# Altium PCB DigitalLabBoard-CS.PcbDoc (part 1 of 3)
Units mm, origin at the board's own origin, x right, y up, seen from the top; angles counter-clockwise.
Board outline 155 x 110 mm, 2 copper layers (Top Layer, Bottom Layer), stack 1.571 mm thick; 189 components, 184 nets, 775 pads, 859 vias.
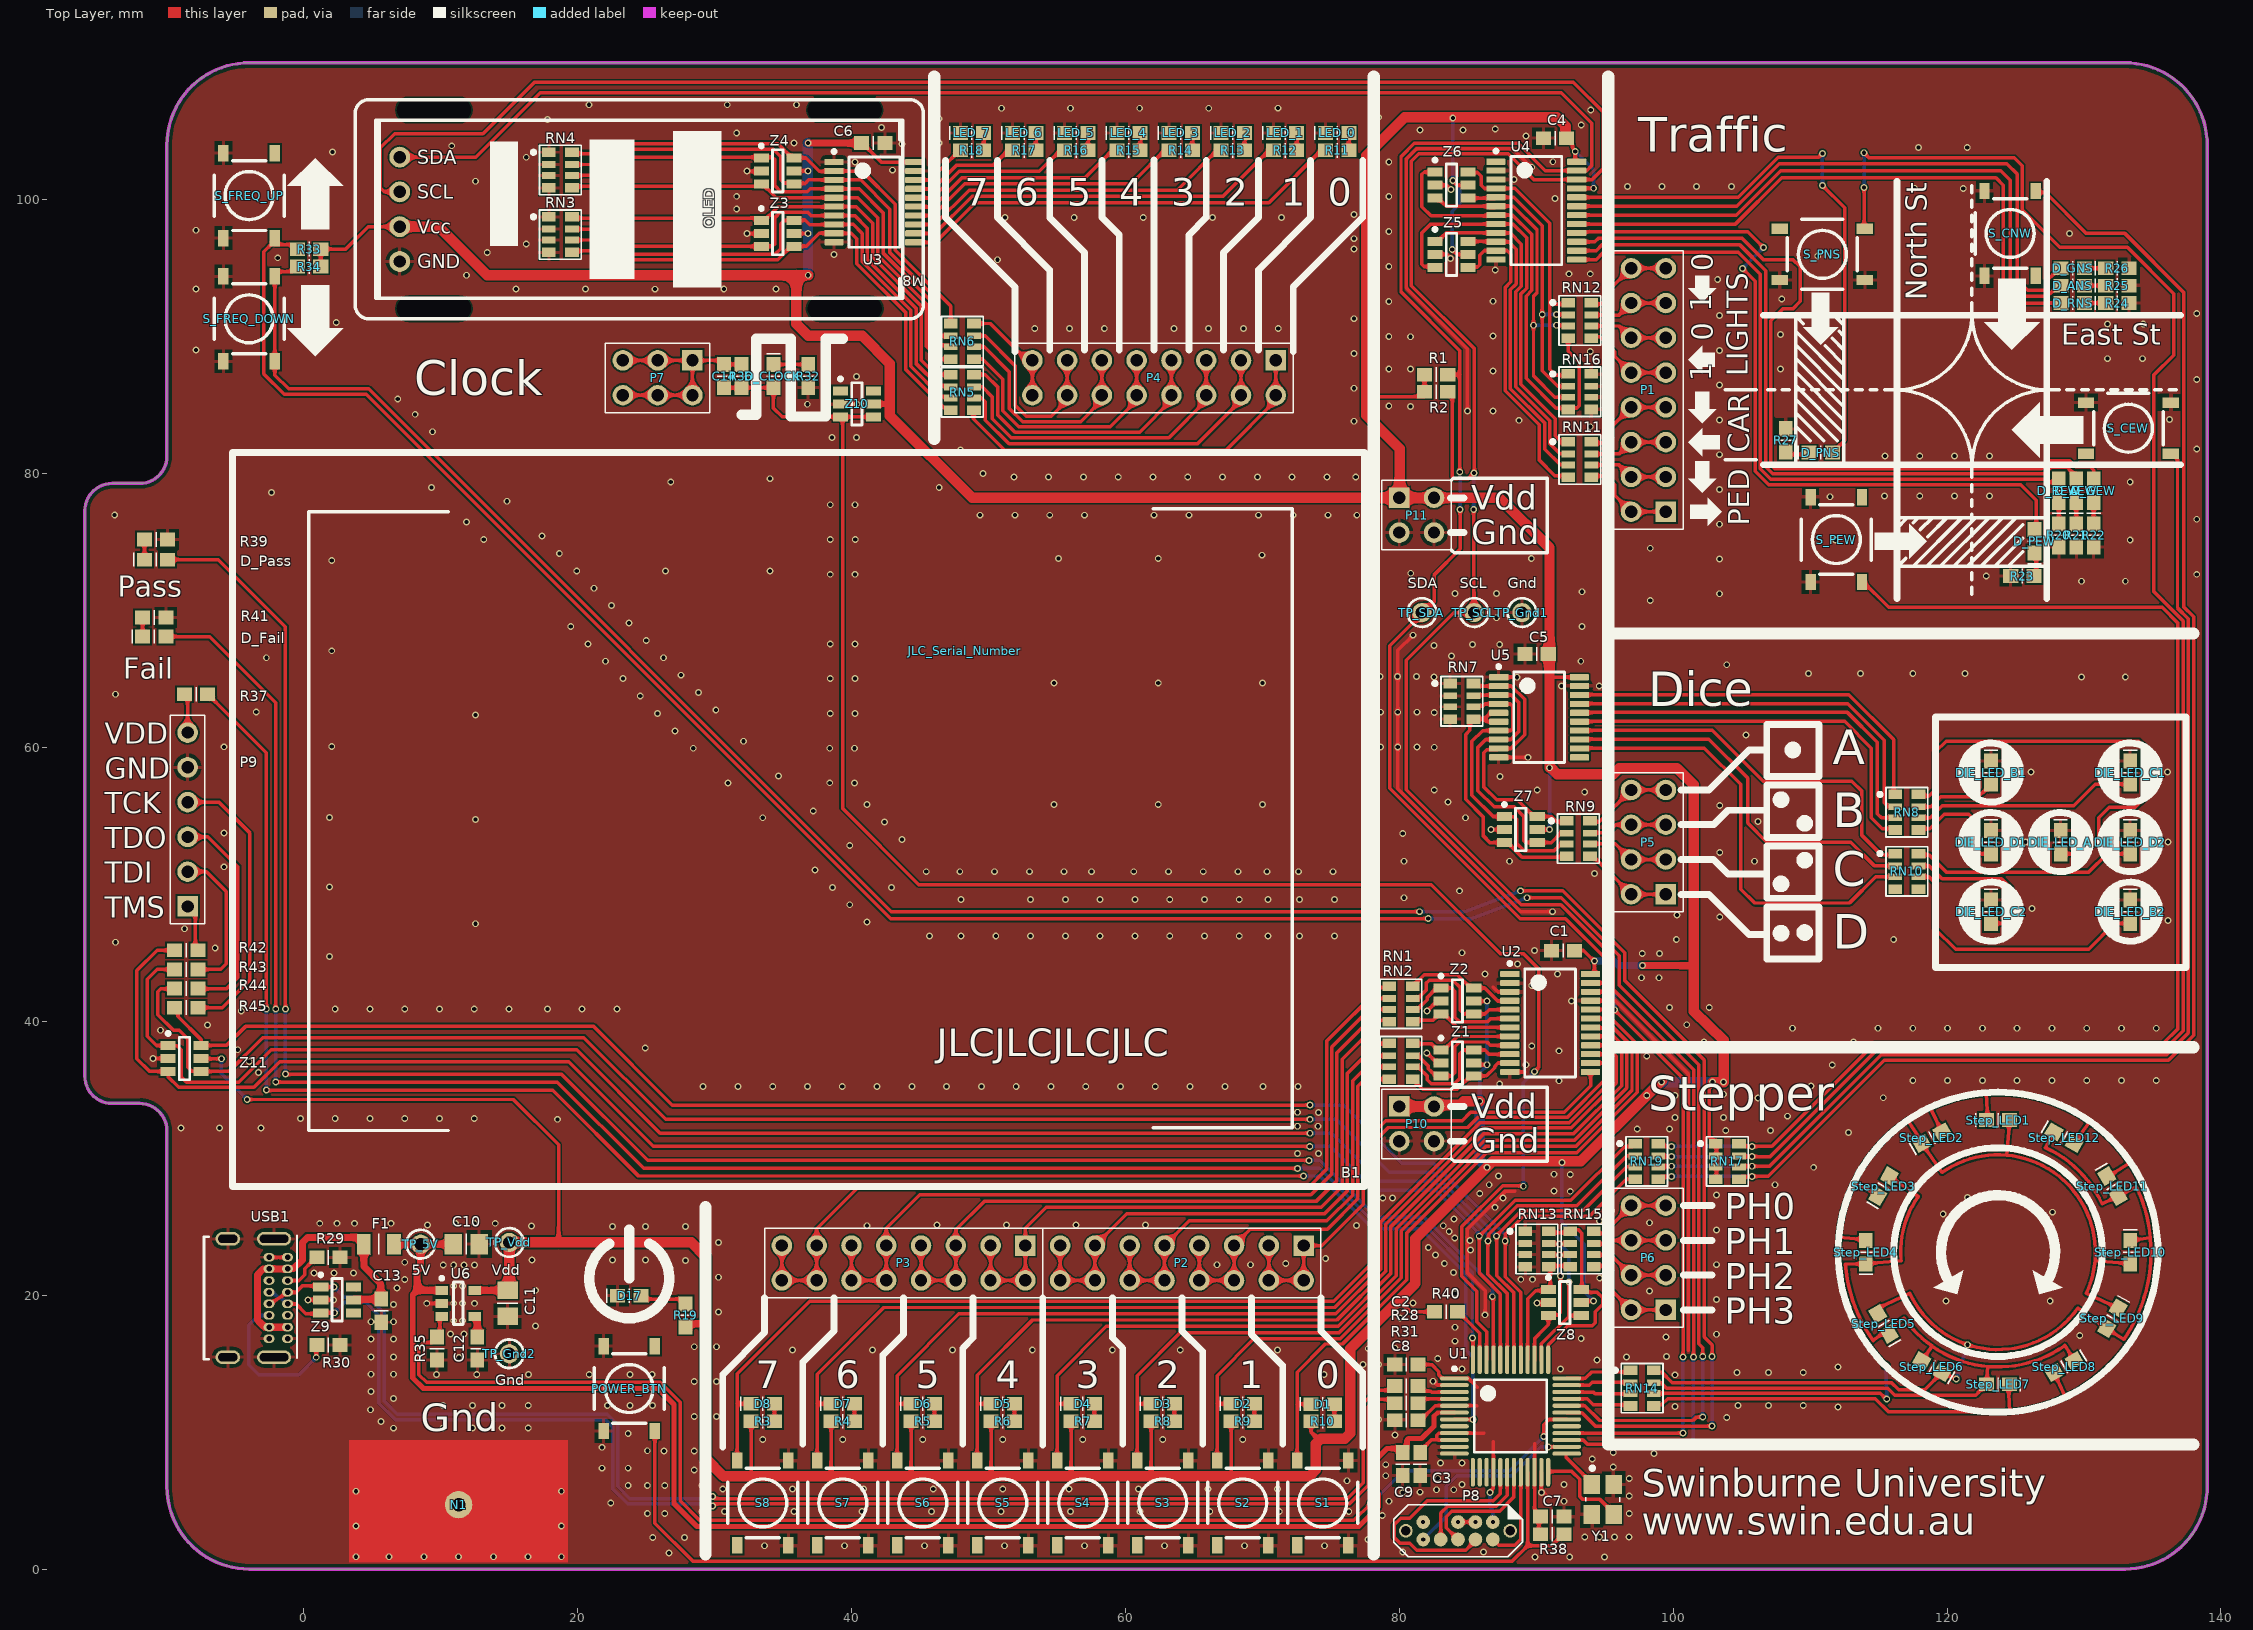
[diagram p0: Top Layer view]
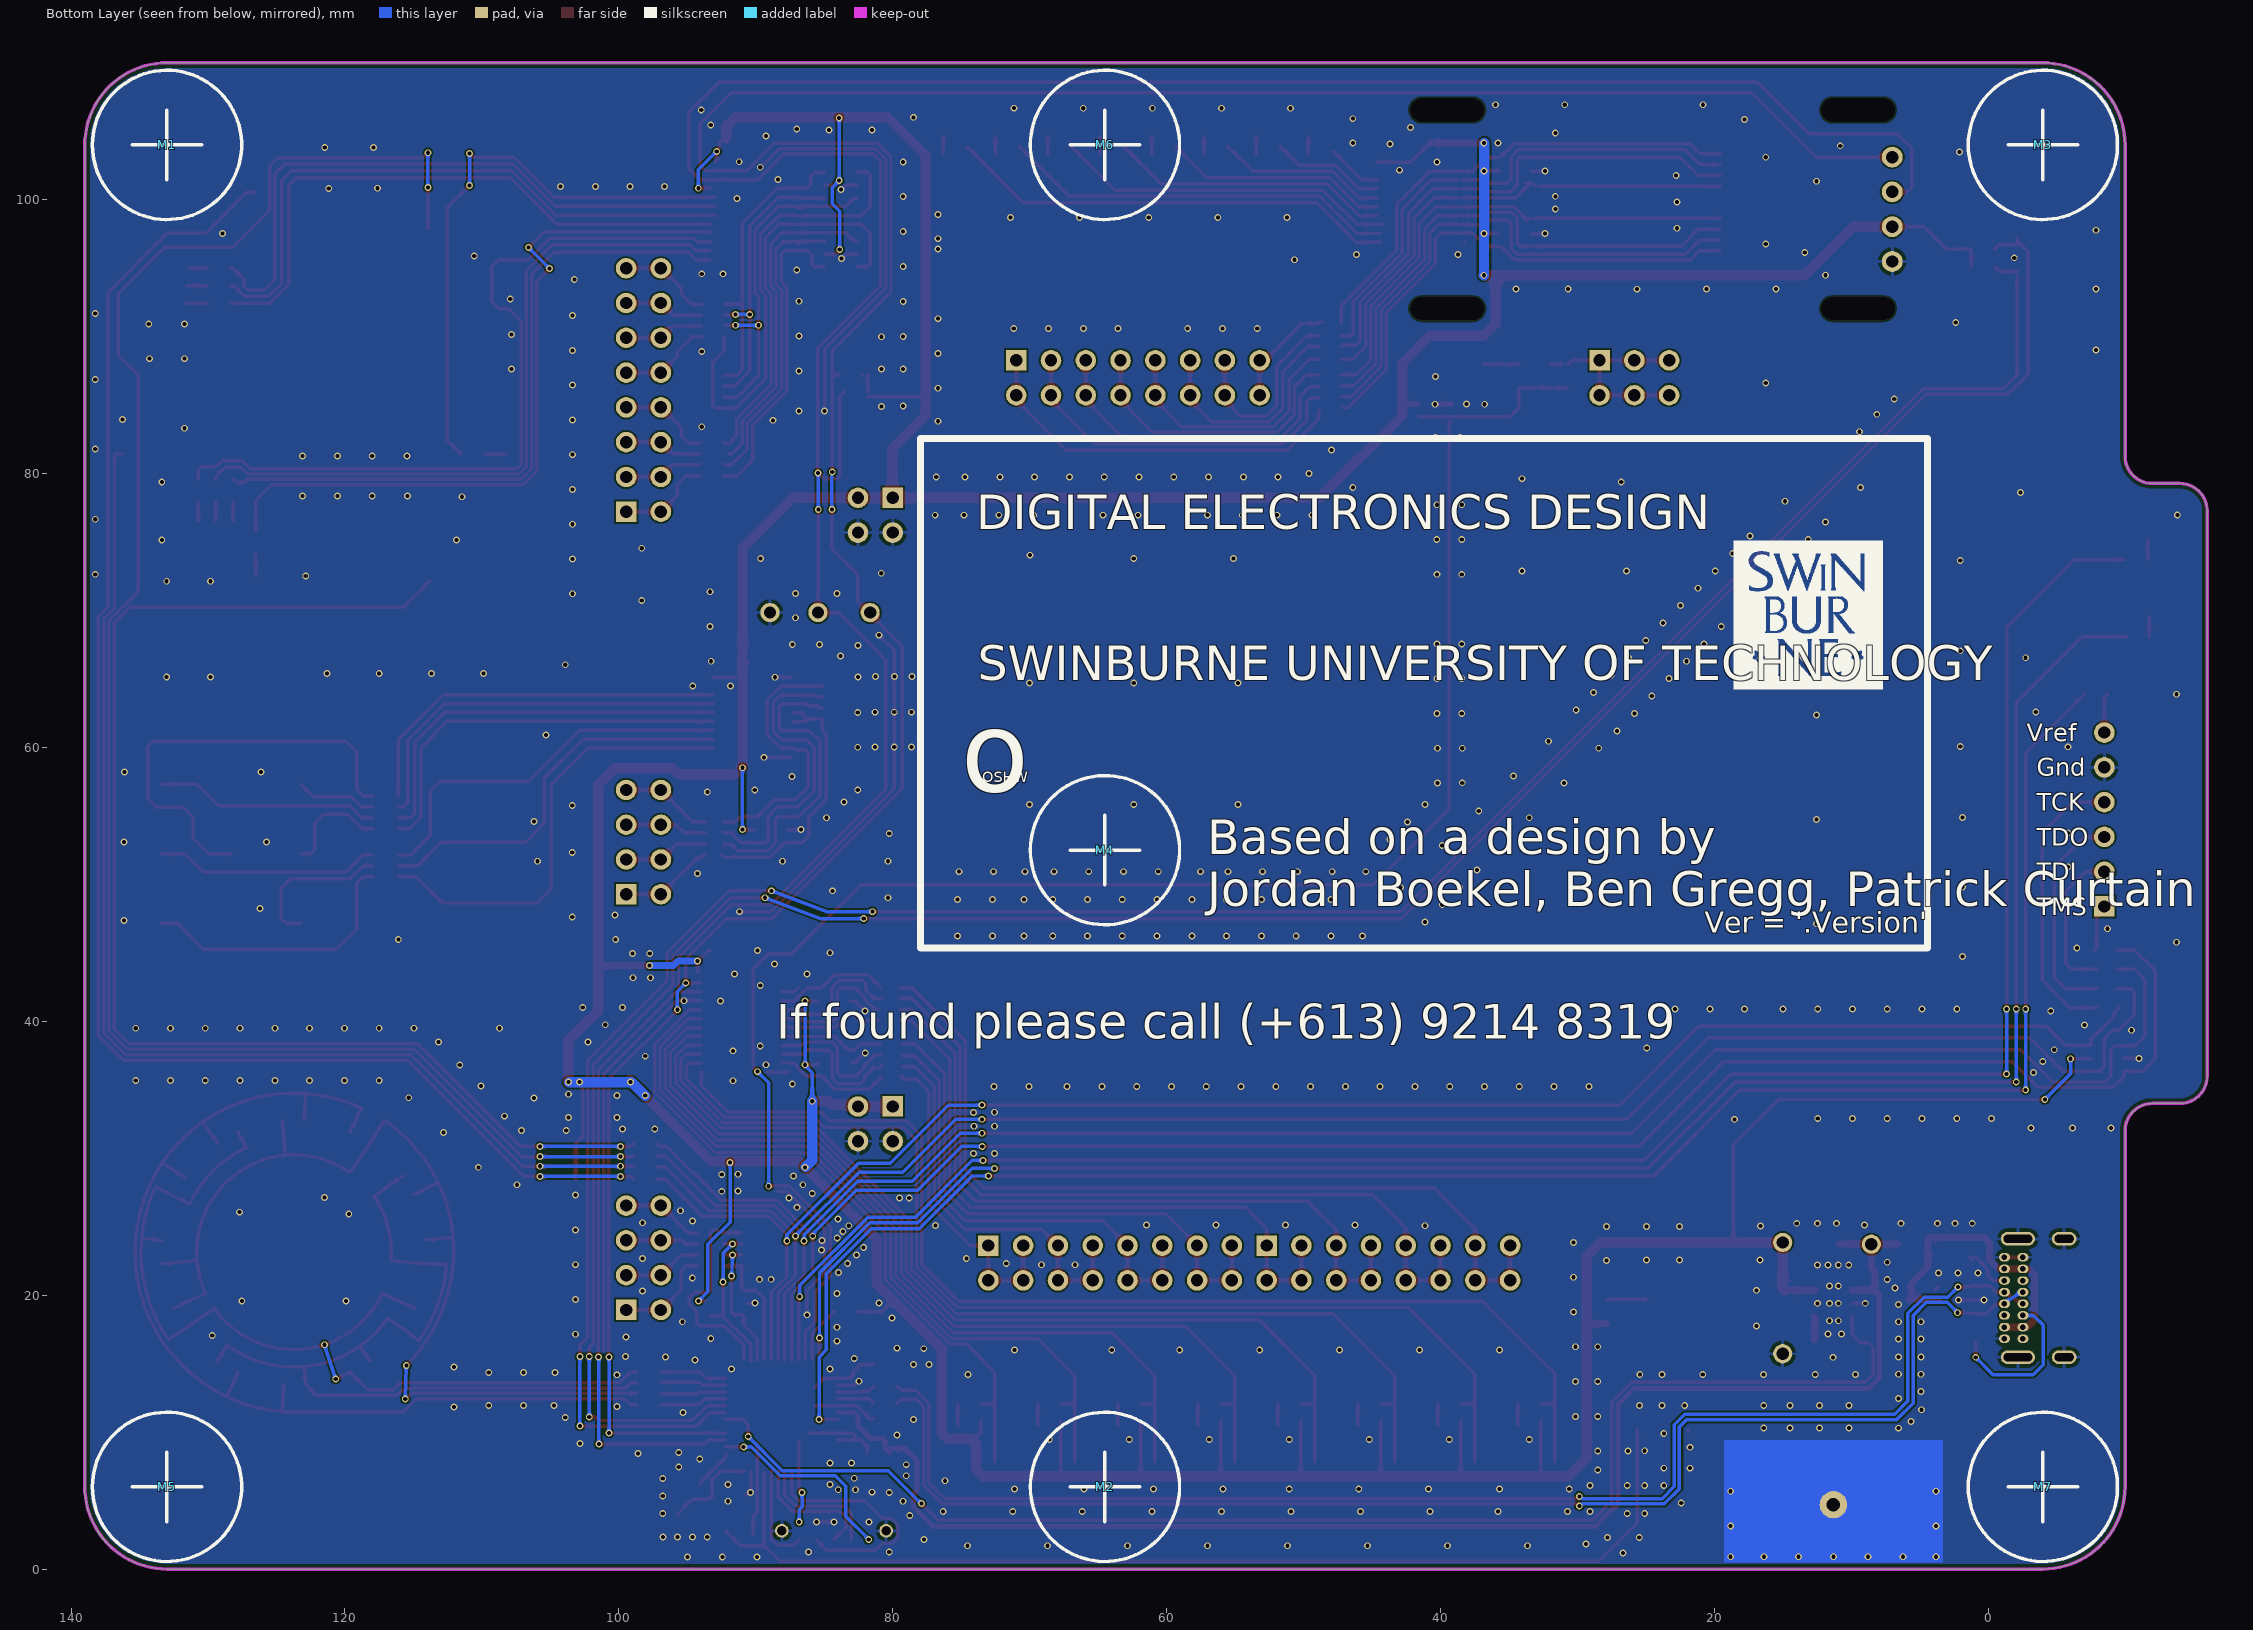
[diagram p1: Bottom Layer view, seen from below]

## Layer stack, top to bottom
Top Solder: solder mask 0.0102, Solder Resist, Dk 3.5
Top Layer: signal copper 0.0356
Dielectric 1: dielectric 1.5, FR-4, Dk 4.8
Bottom Layer: signal copper 0.0356
Bottom Solder: solder mask 0.0102, Solder Resist, Dk 3.5

## Board outline
-14,34 -12,34 cw(c-12,32) -10,32 -10,6 ccw(c-4,6) -4,0 133,0 ccw(c133,6) 139,6 139,104 ccw(c133,104) 133,110 -4,110 ccw(c-4,104) -10,104 -10,81.28 cw(c-12,81.28) -12,79.28 -14,79.28 ccw(c-14,77.28) -16,77.28 -16,36 ccw(c-14,36)

## Design rules (kind name [scope] priority, off if disabled: settings)
BoardOutlineClearance [All] p1: gap=0.381 ignorepadtopadclearanceinfootprint=FALSE
Clearance [All] p1: gap=0.127 ignorepadtopadclearanceinfootprint=FALSE
DiffPairsRouting [All] p1: maxlimit=0.127 minlimit=0.127 mostfreqgap=0.127 toplayer_minwidth=0.254 toplayer_maxwidth=0.254 toplayer_prefwidth=0.254 bottomlayer_minwidth=0.254 bottomlayer_maxwidth=0.254 bottomlayer_prefwidth=0.254 maxuncoupledlength=12.7
HoleSize [All] p1: absolutevalues=TRUE maxlimit=20 minlimit=0.25 maxpercent=80.000 minpercent=20.000
MinimumAnnularRing [All] p1: minimumring=0.089
MinimumSolderMaskSliver [All] p1 off: minsoldermaskwidth=0.254
PolygonConnect PolygonConnect_Via [IsVia] p1: connectstyle=Direct reliefconductorwidth=0.254 reliefentries=4 polygonreliefangle="90 Angle" airgapwidth=0.254
PolygonConnect [All] p2: connectstyle=Relief reliefconductorwidth=0.254 reliefentries=4 polygonreliefangle="90 Angle" airgapwidth=0.254
RoutingVias [All] p1: holewidth=0.711 width=1.27 viastyle="Through Hole" minholewidth=0.711 minwidth=1.27 maxholewidth=0.711 maxwidth=1.27
SilkToSilkClearance [All] p1 off: silktosilkclearance=0.254
SilkToSolderMaskClearance [IsPad] p1 off: minsilkscreentomaskgap=0.254 clearancetoexposedcopper=TRUE
SolderMaskExpansion [All] p1: expansion=0.102 istentingtop=FALSE
Width [All] p1: maxlimit=0.762 minlimit=0.254 preferedwidth=0.254
25 further rules are at their usual default settings.

## Classes and differential pairs
differential pair USBD_R: +USBD_R_P -USBD_R_N
differential pair USBD: +USBD_P -USBD_N

## Components (designator, comment, footprint, x,y, rotation, side; value= is the part's Value field where it differs from the comment)
B1 "Breadboard - 300 Hole" "BREADBOARD - 300 HOLES" 36.053,54.736 r0 top locked
C1 "100nF" CCNP1608-0603 91.959,45.16 r0 top
C2 "100nF" CCNP1608-0603 80.518,14.934 r0 top
C3 "100nF" CCNP1608-0603 81.519,7.665 r90 top
C4 "100nF" CCNP1608-0603 91.374,104.495 r0 top
C5 "100nF" CCNP1608-0603 90.028,66.826 r0 top
C6 "100nF" CCNP1608-0603 41.586,104.139 r180 top
C7 "100nF" CCNP1608-0603 91.171,3.834 r180 top
C8 "2.2uF" CCNP1608-0603 80.518,10.871 r0 top
C9 "1uF" CCNP1608-0603 80.249,7.665 r90 top
C10 "10uF" CCNP2012-0805 11.854,23.723 r180 top
C11 "10uF" CCNP2012-0805 14.876,19.405 r90 top
C12 "10nF" CCNP1608-0603 12.67,16.103 r90 top
C13 "100nF" CCNP1608-0603 5.656,18.871 r90 top
C14 "100nF" CCNP1608-0603 30.683,87.122 r270 top
D1 "LED Red" LED1608-0603-RED 74.407,12.044 r0 top locked
D2 "LED Red" LED1608-0603-RED 68.565,12.064 r0 top locked
D3 "LED Red" LED1608-0603-RED 62.723,12.064 r0 top locked
D4 "LED Red" LED1608-0603-RED 56.881,12.064 r0 top locked
D5 "LED Red" LED1608-0603-RED 51.039,12.064 r0 top locked
D6 "LED Red" LED1608-0603-RED 45.197,12.064 r0 top locked
D7 "LED Red" LED1608-0603-RED 39.355,12.064 r0 top locked
D8 "LED Red" LED1608-0603-RED 33.513,12.064 r0 top locked
D17 "LED Red" LED1608-0603-RED 23.76,19.96 r0 top locked
D_AEW "LED Yellow" LED1608-0603-YELLOW 129.438,78.739 r90 top locked
D_ANS "LED Yellow" LED1608-0603-YELLOW 129.184,93.725 r180 top locked
D_CLOCK "LED Red" LED1608-0603-RED 34.29,87.122 r270 top locked
D_Fail "LED Red" LED1608-0603-RED -10.922,68.097 r0 top locked
D_GEW "LED Green" LED1608-0603-GREEN 130.708,78.739 r90 top locked
D_GNS "LED Green" LED1608-0603-GREEN 129.184,94.995 r180 top locked
D_Pass "LED Green" LED1608-0603-GREEN -10.795,73.715 r0 top locked
D_PEW "LED Green" LED1608-0603-GREEN 126.39,75.056 r90 top locked
D_PNS "LED Green" LED1608-0603-GREEN 110.769,81.533 r0 top locked
D_REW "LED Red" LED1608-0603-RED 128.168,78.739 r90 top locked
D_RNS "LED Red" LED1608-0603-RED 129.184,92.455 r180 top locked
DIE_LED_A "LED Red" LED1608-0603-RED 128.295,53.085 r270 top locked
DIE_LED_B1 "LED Red" LED1608-0603-RED 123.215,58.165 r270 top locked
DIE_LED_B2 "LED Red" LED1608-0603-RED 133.375,48.005 r270 top locked
DIE_LED_C1 "LED Red" LED1608-0603-RED 133.375,58.165 r270 top locked
DIE_LED_C2 "LED Red" LED1608-0603-RED 123.215,48.005 r270 top locked
DIE_LED_D1 "LED Red" LED1608-0603-RED 123.215,53.085 r270 top locked
DIE_LED_D2 "LED Red" LED1608-0603-RED 133.375,53.085 r270 top locked
F1 "SMD0805-050" SMD0805-050 5.478,23.723 r0 top
JLC_Serial_Number "JLC_Serial_Number" JLC_SERIAL_NUMBER 48.245,67.067 r0 top
LED_0 "LED Red" LED1608-0603-RED 75.462,104.875 r0 top locked
LED_1 "LED Red" LED1608-0603-RED 71.652,104.875 r0 top locked
LED_2 "LED Red" LED1608-0603-RED 67.842,104.875 r0 top locked
LED_3 "LED Red" LED1608-0603-RED 64.032,104.875 r0 top locked
LED_4 "LED Red" LED1608-0603-RED 60.222,104.875 r0 top locked
LED_5 "LED Red" LED1608-0603-RED 56.412,104.875 r0 top locked
LED_6 "LED Red" LED1608-0603-RED 52.602,104.875 r0 top locked
LED_7 "LED Red" LED1608-0603-RED 48.792,104.875 r0 top locked
Logo "OSHW Logo" OSHW 185.293,55.499 r180 bottom
M1 "Plastic Bumper" BUMPER_RBS-2 133,104 r180 bottom locked
M2 "Plastic Bumper" BUMPER_RBS-2 64.5,5.999 r180 bottom locked
M3 "Plastic Bumper" BUMPER_RBS-2 -4,104 r180 bottom locked
M4 "Plastic Bumper" BUMPER_RBS-2 64.5,52.5 r180 bottom
M5 "Plastic Bumper" BUMPER_RBS-2 133,5.999 r180 bottom locked
M6 "Plastic Bumper" BUMPER_RBS-2 64.5,104 r180 bottom locked
M7 "Plastic Bumper" BUMPER_RBS-2 -4,5.999 r180 bottom locked
M8 "OLED_Surround" OLED_SURROUND 24.5,99.302 r0 top locked
N1 "Gnd" NALCLIP-EDGE 11.3,4.7 r0 top
OLED "OLED_Display" OLED_DISPLAY_128X32 24.5,99.302 r0 top locked
P1 "Header 2x8" HDR2X8S 99.466,77.215 r90 top locked
P2 "Header 2x8" HDR2X8S 73.01,23.621 r180 top locked
P3 "Header 2x8" HDR2X8S 52.69,23.621 r180 top locked
P4 "Header 2x8" HDR2X8S 70.978,88.265 r180 top locked
P5 "Header 2x4" HDR2X4S 99.466,49.275 r90 top locked
P6 "Header 2x4" HDR2X4S 99.466,18.922 r90 top locked
P7 "Header 2x3" HDR2X3S 28.377,88.265 r180 top locked
P8 "SWD Connector 2x5-Pin" SWD-2X5-JIG-PADS 86.828,3.428 r180 top locked
P9 "Header, 6-Pin" HDR1X6S -8.492,48.386 r90 top locked
P10 "Header 2x2" HDR2X2S 79.995,33.781 r270 top locked
P11 "Header 2x2" HDR2X2S 79.995,78.231 r270 top locked
POWER_BTN "SMD-SW-4_5.1x5.1x2.0_M" SMD-SW-4_5.1X5.1X2.0_M 23.76,13.182 r90 top locked
R1 "4.7K" CR1608-0603 82.688,87.223 r180 top
R2 "4.7K" CR1608-0603 82.688,85.978 r180 top
R3 "1K" CR1608-0603 33.513,10.794 r180 top
R4 "1K" CR1608-0603 39.355,10.794 r180 top
R5 "1K" CR1608-0603 45.197,10.794 r180 top
R6 "1K" CR1608-0603 51.039,10.794 r180 top
R7 "1K" CR1608-0603 56.881,10.794 r180 top
R8 "1K" CR1608-0603 62.723,10.794 r180 top
R9 "1K" CR1608-0603 68.565,10.794 r180 top
R10 "1K" CR1608-0603 74.407,10.794 r180 top
R11 "1K" CR1608-0603 75.462,103.605 r180 top
R12 "1K" CR1608-0603 71.652,103.605 r180 top
R13 "1K" CR1608-0603 67.842,103.605 r180 top
R14 "1K" CR1608-0603 64.032,103.605 r180 top
R15 "1K" CR1608-0603 60.222,103.605 r180 top
R16 "1K" CR1608-0603 56.412,103.605 r180 top
R17 "1K" CR1608-0603 52.602,103.605 r180 top
R18 "1K" CR1608-0603 48.792,103.605 r180 top
R19 "1K" CR1608-0603 27.874,18.516 r270 top
R20 "1K" CR1608-0603 128.168,75.483 r90 top
R21 "560R" CR1608-0603 129.438,75.483 r90 top
R22 "1K" CR1608-0603 130.708,75.483 r90 top
R23 "1K" CR1608-0603 125.501,72.516 r0 top
R24 "1K" CR1608-0603 132.44,92.455 r180 top
R25 "560R" CR1608-0603 132.44,93.725 r180 top
R26 "1K" CR1608-0603 132.44,94.995 r180 top
R27 "1K" CR1608-0603 108.229,82.422 r270 top
R28 "33R" CR1608-0603 80.518,13.36 r0 top
R29 "5.1K" CR1608-0603 1.795,22.761 r0 top
R30 "5.1K" CR1608-0603 1.795,16.357 r0 top
R31 "33R" CR1608-0603 80.518,12.116 r0 top
R32 "1K" CR1608-0603 36.83,87.122 r270 top
R33 "10K" CR1608-0603 0.381,96.393 r0 top
R34 "10K" CR1608-0603 0.381,95.123 r0 top
R35 "10K" CR1608-0603 9.72,16.103 r90 top
R36 "100R" CR1608-0603 31.953,87.122 r270 top
R37 "10K" CR1608-0603 -7.874,63.881 r180 top
R38 "10K" CR1608-0603 91.171,2.539 r0 top
R39 "1K" CR1608-0603 -10.795,75.183 r180 top
R40 "470R" CR1608-0603 83.414,18.785 r0 top
R41 "1K" CR1608-0603 -10.922,69.494 r180 top
R42 "100R" CR1608-0603 -8.585,45.187 r0 top
R43 "100R" CR1608-0603 -8.585,43.79 r0 top
R44 "100R" CR1608-0603 -8.585,42.393 r0 top
R45 "100R" CR1608-0603 -8.585,40.996 r0 top
RN1 "470R" CR1206-0603_X4_N 80.122,41.274 r270 top
RN2 "470R" CR1206-0603_X4_N 80.122,37.083 r270 top
RN3 "10K" CR1206-0603_X4_N 18.735,97.453 r270 top
RN4 "10K" CR1206-0603_X4_N 18.735,102.166 r270 top
RN5 "470R" CR1206-0603_X4_N 48.093,85.927 r270 top
RN6 "470R" CR1206-0603_X4_N 48.093,89.661 r270 top
RN7 "10K" CR1206-0603_X4_N 84.567,63.372 r270 top
RN8 "1K" CR1206-0603_X4_N 117.068,55.269 r270 top
RN9 "470R" CR1206-0603_X4_N 93.076,53.339 r270 top
RN10 "1K" CR1206-0603_X4_N 117.068,50.951 r270 top
RN11 "470R" CR1206-0603_X4_N 93.178,81.025 r270 top
RN12 "470R" CR1206-0603_X4_N 93.178,91.185 r270 top
RN13 "10K" CR1206-0603_X4_N 90.054,23.367 r270 top
RN14 "470R" CR1206-0603_X4_N 97.739,13.208 r270 top
RN15 "470R" CR1206-0603_X4_N 93.344,23.372 r270 top
RN16 "10K" CR1206-0603_X4_N 93.178,85.978 r270 top
RN17 "10K" CR1206-0603_X4_N 103.962,29.769 r270 top
RN19 "1K" CR1206-0603_X4_N 98.07,29.769 r270 top
S1 "SMD-SW-4_5.1x5.1x2.0_M" SMD-SW-4_5.1X5.1X2.0_M 74.407,4.825 r90 top locked
S2 "SMD-SW-4_5.1x5.1x2.0_M" SMD-SW-4_5.1X5.1X2.0_M 68.565,4.825 r90 top locked
S3 "SMD-SW-4_5.1x5.1x2.0_M" SMD-SW-4_5.1X5.1X2.0_M 62.723,4.825 r90 top locked
S4 "SMD-SW-4_5.1x5.1x2.0_M" SMD-SW-4_5.1X5.1X2.0_M 56.881,4.825 r90 top locked
S5 "SMD-SW-4_5.1x5.1x2.0_M" SMD-SW-4_5.1X5.1X2.0_M 51.039,4.825 r90 top locked
S6 "SMD-SW-4_5.1x5.1x2.0_M" SMD-SW-4_5.1X5.1X2.0_M 45.197,4.825 r90 top locked
S7 "SMD-SW-4_5.1x5.1x2.0_M" SMD-SW-4_5.1X5.1X2.0_M 39.355,4.825 r90 top locked
S8 "SMD-SW-4_5.1x5.1x2.0_M" SMD-SW-4_5.1X5.1X2.0_M 33.513,4.825 r90 top locked
S_CEW "SMD-SW-4_5.1x5.1x2.0_M" SMD-SW-4_5.1X5.1X2.0_M 133.248,83.311 r180 top locked
S_CNW "SMD-SW-4_5.1x5.1x2.0_M" SMD-SW-4_5.1X5.1X2.0_M 124.612,97.535 r270 top locked
S_FREQ_DOWN "SMD-SW-4_5.1x5.1x3.5_M" SMD-SW-4_5.1X5.1X3.5_M -4,91.302 r270 top locked
S_FREQ_UP "SMD-SW-4_5.1x5.1x3.5_M" SMD-SW-4_5.1X5.1X3.5_M -4,100.302 r270 top locked
S_PEW "SMD-SW-4_5.1x5.1x2.0_M" SMD-SW-4_5.1X5.1X2.0_M 111.912,75.183 r90 top locked
S_PNS "SMD-SW-4_5.1x5.1x2.0_M" SMD-SW-4_5.1X5.1X2.0_M 110.896,96.011 r0 top locked
Step_LED1 "LED Red" LED1608-0603-RED 123.723,32.79 r0 top locked
Step_LED2 "LED Red" LED1608-0603-RED 118.897,31.497 r30 top locked
Step_LED3 "LED Red" LED1608-0603-RED 115.364,27.964 r60 top locked
Step_LED4 "LED Red" LED1608-0603-RED 114.071,23.138 r90 top locked
Step_LED5 "LED Red" LED1608-0603-RED 115.364,17.906 r120 top locked
Step_LED6 "LED Red" LED1608-0603-RED 118.897,14.78 r150 top locked
Step_LED7 "LED Red" LED1608-0603-RED 123.723,13.486 r180 top locked
Step_LED8 "LED Red" LED1608-0603-RED 128.549,14.78 r210 top locked
Step_LED9 "LED Red" LED1608-0603-RED 132.082,18.312 r240 top locked
Step_LED10 "LED Red" LED1608-0603-RED 133.375,23.138 r270 top locked
Step_LED11 "LED Red" LED1608-0603-RED 132.082,27.964 r300 top locked
Step_LED12 "LED Red" LED1608-0603-RED 128.549,31.497 r330 top locked
TP_5V "5V" "PCBPIN - 0.9MM" 8.526,23.723 r0 top locked
TP_Gnd1 "Gnd" "PCBPIN - 0.9MM" 88.959,69.85 r90 top locked
TP_Gnd2 "Gnd" "PCBPIN - 0.9MM" 15.003,15.722 r0 top locked
TP_SCL "SCL" "PCBPIN - 0.9MM" 85.456,69.85 r90 top locked
TP_SDA "SDA" "PCBPIN - 0.9MM" 81.646,69.85 r90 top locked
TP_Vdd "Vdd" "PCBPIN - 0.9MM" 15.003,23.85 r90 top locked
U1 "MK20DX128VLF5" TSQFP50P900X900-48M 88.123,11.175 r270 top locked
U2 "PCA9555PW,118" TSSOP24_N 91.019,39.877 r270 top
U3 "74HC541PW,118" TSSOP20_N 41.667,99.821 r270 top
U4 "PCA9535PW,118" TSSOP24_N 90.003,99.2 r270 top
U5 "74HC541PW,118" TSSOP20_N 90.206,62.204 r270 top
U6 "SPX3819M5-L-3-3/TR" SOT-23-5_L 11.273,19.405 r180 top
USB1 "USB4085-GF-A" USB4085-GF-A -3.374,19.793 r0 top
Y1 "16 MHz" CRYSTAL_SMD_3.2X2.5 94.854,5.079 r270 top
Z1 "CM1293A-04SO" SOT457_N 84.237,36.956 r0 top
Z2 "CM1293A-04SO" SOT457_N 84.237,41.481 r0 top
Z3 "CM1293A-04SO" SOT457_N 34.605,97.535 r0 top
Z4 "CM1293A-04SO" SOT457_N 34.605,102.107 r0 top
Z5 "CM1293A-04SO" SOT457_N 83.805,96.011 r0 top
Z6 "CM1293A-04SO" SOT457_N 83.805,101.066 r0 top
Z7 "CM1293A-04SO" SOT457_N 88.873,54.004 r0 top
Z8 "CM1293A-04SO" SOT457_N 92.086,19.455 r0 top
Z9 "CM1293A-04SO" SOT457_N 2.43,19.659 r0 top
Z10 "CM1293A-04SO" SOT457_N 40.386,85.09 r0 top
Z11 "CM1293A-04SO" SOT457_N -8.712,37.287 r0 top

## Footprints (in the part's own frame and the unit in brackets; to place one, negate y for a bottom-side part, rotate by r counter-clockwise, add the part's x,y. Pads: shape width x height; smd on the part's side, far side on the other; paste and mask are expansions set on the pad)
"BREADBOARD - 300 HOLES" [mm] "Breadboard - 300 holes"
  silkscreen extent -41.28,-26.8 41.4,26.8, body extent -41,-26.75 41,26.75, height 10
BUMPER_RBS-2 [mm] "Plastic bumper/foot"
  silkscreen extent -5.45,-5.45 5.45,5.45, body extent -5.55,-5.55 5.55,5.55, height 5.1
CCNP1608-0603 [mm]
  rect 1.1x1 smd: 1(-0.85,0) 2(0.85,0)
  silkscreen extent 0,-0.5 0,0.5, body extent -0.8,-0.4 0.8,0.4, height 0.3
CCNP2012-0805 [mm]
  rect 1.3x1.5 smd: 1(-0.95,0) 2(0.95,0)
  silkscreen extent 0,-0.75 0,0.75, body extent -1,-0.62 1,0.63, height 0.78
CR1206-0603_X4_N [mm] "Chip Array, ConvexS, 8-Leads, Pitch 0.80mm, Body 3.40x1.75mm, IPC Medium Density"
  rect 0.7x1 smd: 1(-1.3,-0.85) 4(1.3,-0.85) 5(1.3,0.85) 8(-1.3,0.85)
  rect 0.5x1 smd: 2(-0.4,-0.85) 3(0.4,-0.85) 6(0.4,0.85) 7(-0.4,0.85)
  silkscreen extent -1.8,-2.07 1.8,1.52, body extent -1.6,-0.8 1.6,0.8, height 0.5
CR1608-0603 [mm]
  rect 1.1x1 smd: 1(-0.85,0) 2(0.85,0)
  silkscreen extent 0,-0.53 0,0.53, body extent -0.85,-0.4 0.85,0.4, height 0.56
CRYSTAL_SMD_3.2X2.5 [mm] "Crystal SMT low profile 3.2 x 2.5 SMD"
  rect 1.4x1.2 smd: 1(-1.1,-0.8) 2(1.1,-0.8) 3(1.1,0.8) 4(-1.1,0.8)
  silkscreen extent -2.39,-1.25 0.15,1.25, body extent -1.55,-1.24 1.65,1.26, height 0.7
HDR1X6S [mm] "Header; 6 Position; Straight"
  rect 1.5x1.5 hole 0.9: 1(0,0)
  round 1.5 hole 0.9: 2(2.54,0) 3(5.08,0) 4(7.62,0) 5(10.16,0) 6(12.7,0)
  silkscreen extent -1.27,-1.27 13.97,1.27, body extent -1.27,-1.27 13.97,1.27, height 6
HDR2X2S [mm] "Header; 2x2 Position; Straight"
  rect 1.5x1.5 hole 0.9: 1(0,0)
  round 1.5 hole 0.9: 2(0,2.54) 3(2.54,0) 4(2.54,2.54)
  silkscreen extent -1.27,-1.27 3.81,3.81, body extent -1.27,-1.27 3.81,3.81, height 6
HDR2X3S [mm] "Header; 2x3 Position; Straight"
  rect 1.5x1.5 hole 0.9: 1(0,0)
  round 1.5 hole 0.9: 2(0,2.54) 3(2.54,0) 4(2.54,2.54) 5(5.08,0) 6(5.08,2.54)
  silkscreen extent -1.27,-1.27 6.35,3.81, body extent -1.27,-1.27 6.35,3.81, height 6
HDR2X4S [mm] "Connector; Header; 2x4 Position; Straight"
  rect 1.5x1.5 hole 0.9: 1(0,0)
  round 1.5 hole 0.9: 2(0,2.54) 3(2.54,0) 4(2.54,2.54) 5(5.08,0) 6(5.08,2.54) 7(7.62,0) 8(7.62,2.54)
  silkscreen extent -1.27,-1.27 8.89,3.81, body extent -1.27,-1.27 8.89,3.81, height 6
HDR2X8S [mm] "Connector; Header; 2x8 Position; Straight"
  rect 1.5x1.5 hole 0.9: 1(0,0)
  round 1.5 hole 0.9: 2(0,2.54) 3(2.54,0) 4(2.54,2.54) 5(5.08,0) 6(5.08,2.54) 7(7.62,0) 8(7.62,2.54) 9(10.16,0) 10(10.16,2.54) 11(12.7,0) 12(12.7,2.54) 13(15.24,0) 14(15.24,2.54) 15(17.78,0) 16(17.78,2.54)
  silkscreen extent -1.27,-1.27 19.05,3.81, body extent -1.27,-1.27 19.05,3.81, height 6
JLC_SERIAL_NUMBER [mm] "JLC Serial Number"
LED1608-0603-GREEN [mm] "SMT-LED 0603"
  rect 1.1x1 smd: A(0.85,0) K(-0.85,0)
  silkscreen extent -1.62,-0.5 0,0.5, body extent -0.8,-0.4 0.8,0.4, height 0.7
LED1608-0603-RED [mm] "SMT-LED 0603"
  rect 1.1x1 smd: A(0.85,0) K(-0.85,0)
  silkscreen extent -1.62,-0.5 0,0.5, body extent -0.8,-0.4 0.8,0.4, height 0.7
LED1608-0603-YELLOW [mm] "SMT-LED 0603"
  rect 1.1x1 smd: A(0.85,0) K(-0.85,0)
  silkscreen extent -1.62,-0.5 0,0.5, body extent -0.8,-0.4 0.8,0.4, height 0.7
NALCLIP-EDGE [mm] "Nalclip on edge of PCB"
  round 2 hole 1: 1(0,0)
  Top Layer region: -8,-4.21 8,-4.21 8,4.705 -8,4.705
  Bottom Layer region: -8,-4.21 8,-4.21 8,4.705 -8,4.705
  body extent -6.4,-5.06 6.4,4.03, height 1.07
OLED_DISPLAY_128X32 [mm] "Small OLED Display"
  round 1.524 hole 0.9: 1(-17.5,-3.81) 2(-17.5,-1.27) 3(-17.5,1.27) 4(-17.5,3.81)
  silkscreen extent -19,-6.5 19.02,6.5, body extent -19,-6.5 19,6.5, height 4
OLED_SURROUND [mm] "Surround for OLED"
  oval 5x1.5 hole 1.7 slot 5.4 at 0 deg unplated: 0(-15,-7.25) 0(-15,7.25) 0(15,-7.25) 0(15,7.25)
  silkscreen extent -20.75,-8 20.75,8, body extent -20.75,-8 20.75,8, height 6
OSHW [mm] "OSHW Logo"
"PCBPIN - 0.9MM" [mm]
  round 1.4 hole 0.9: 1(0,0)
  silkscreen extent -1.05,-1.05 1.05,1.05, body extent -1.27,-1.27 1.27,1.27, height 6
SMD0805-050 [mm]
  rect 1x1.5 smd: 1(-1.1,0) 2(1.1,0)
  silkscreen extent 0,-0.75 0,0.75, body extent -1.05,-0.68 1.05,0.68, height 0.61
SMD-SW-4_5.1X5.1X2.0_M [mm] "Miniature SMD PCB Push Button - C318888"
  rect 1.2x0.762 smd: 1(3.1,-1.875) 1b(-3.1,-1.875) 2(3.1,1.875) 2b(-3.1,1.875)
  silkscreen extent -2.55,-2.55 2.55,2.55, body extent -3.2,-2.65 3.2,2.65, height 2
SMD-SW-4_5.1X5.1X3.5_M [mm] "Miniature SMD PCB Push Button - C318886"
  rect 1.2x0.762 smd: 1(3.1,-1.875) 1b(-3.1,-1.875) 2(3.1,1.875) 2b(-3.1,1.875)
  silkscreen extent -2.55,-2.55 2.55,2.55, body extent -3.2,-2.65 3.2,2.65, height 3.5
SOT457_N [mm] "SOT23, 6-Leads, Body 2.9x1.5mm, Pitch 0.95mm, Lead Span 2.8mm, IPC Medium Density"
  rect 1.1x0.65 smd: 1(-1.2,0.95) 2(-1.2,0) 3(-1.2,-0.95) 4(1.2,-0.95) 5(1.2,0) 6(1.2,0.95)
  silkscreen extent -1.32,-1.55 0.38,1.95, body extent -1.34,-1.5 1.5,1.4, height 1.21
SOT-23-5_L [mm] "SOT23, 5-Leads, Body 2.9x1.7mm, Pitch 0.95mm, Lead Span 2.8mm, IPC High Density"
  rect 0.9x0.65 smd: 1(1.2,-0.95) 2(1.2,0) 3(1.2,0.95) 4(-1.2,0.95) 5(-1.2,-0.95)
  silkscreen extent -0.35,-1.95 1.32,1.55, body extent -1.5,-1.5 1.5,1.5, height 1.45
SWD-2X5-JIG-PADS [mm] "Connector; SWD; 2x5 Position"
  round 1 hole 0.7: 0(-1.27,0.635) 0(6.35,0.635)
  round 1 smd: 1(0,0) 2(0,1.27) 3(1.27,0) 4(1.27,1.27) 5(2.54,0) 6(2.54,1.27) 8(3.81,1.27) 9(5.08,0) 10(5.08,1.27)
  silkscreen extent -2.16,-1.26 7.24,2.53
TSQFP50P900X900-48M [mm] "Thin QFP, 48-Leads, Body 7x7mm, Pitch 0.5mm, IPC Low Density"
  oval 0.3x2.1 smd: 1(-2.75,-4.1) 2(-2.25,-4.1) 3(-1.75,-4.1) 4(-1.25,-4.1) 5(-0.75,-4.1) 6(-0.25,-4.1) 7(0.25,-4.1) 8(0.75,-4.1) 9(1.25,-4.1) 10(1.75,-4.1) 11(2.25,-4.1) 12(2.75,-4.1) 25(2.75,4.1) 26(2.25,4.1) 27(1.75,4.1) 28(1.25,4.1) 29(0.75,4.1) 30(0.25,4.1) 31(-0.25,4.1) 32(-0.75,4.1) 33(-1.25,4.1) 34(-1.75,4.1) 35(-2.25,4.1) 36(-2.75,4.1)
  oval 2.1x0.3 smd: 13(4.1,-2.75) 14(4.1,-2.25) 15(4.1,-1.75) 16(4.1,-1.25) 17(4.1,-0.75) 18(4.1,-0.25) 19(4.1,0.25) 20(4.1,0.75) 21(4.1,1.25) 22(4.1,1.75) 23(4.1,2.25) 24(4.1,2.75) 37(-4.1,2.75) 38(-4.1,2.25) 39(-4.1,1.75) 40(-4.1,1.25) 41(-4.1,0.75) 42(-4.1,0.25) 43(-4.1,-0.25) 44(-4.1,-0.75) 45(-4.1,-1.25) 46(-4.1,-1.75) 47(-4.1,-2.25) 48(-4.1,-2.75)
  silkscreen extent -3.57,-4.22 2.65,2.65, body extent -4.5,-4.55 4.5,4.45, height 1.6
TSSOP20_N [mm] "Shrink Small Outline; 20 Leads; Body Width 4.4 mm; Pitch 0.65 mm"
  rrect22% 0.45x1.4 smd: 1(-2.925,-2.95) 2(-2.275,-2.95) 3(-1.625,-2.95) 4(-0.975,-2.95) 5(-0.325,-2.95) 6(0.325,-2.95) 7(0.975,-2.95) 8(1.625,-2.95) 9(2.275,-2.95) 10(2.925,-2.95) 11(2.925,2.95) 12(2.275,2.95) 13(1.625,2.95) 14(0.975,2.95) 15(0.325,2.95) 16(-0.325,2.95) 17(-0.975,2.95) 18(-1.625,2.95) 19(-2.275,2.95) 20(-2.925,2.95)
  silkscreen extent -3.82,-3.07 3.3,1.85, body extent -3.3,-3.3 3.3,3.3, height 1.2
TSSOP24_N [mm] "Shrink Small Outline; 24 Leads; Body Width 4.4 mm; Pitch 0.65 mm"
  rrect22% 0.45x1.4 smd: 1(-3.575,-2.95) 2(-2.925,-2.95) 3(-2.275,-2.95) 4(-1.625,-2.95) 5(-0.975,-2.95) 6(-0.325,-2.95) 7(0.325,-2.95) 8(0.975,-2.95) 9(1.625,-2.95) 10(2.275,-2.95) 11(2.925,-2.95) 12(3.575,-2.95) 13(3.575,2.95) 14(2.925,2.95) 15(2.275,2.95) 16(1.625,2.95) 17(0.975,2.95) 18(0.325,2.95) 19(-0.325,2.95) 20(-0.975,2.95) 21(-1.625,2.95) 22(-2.275,2.95) 23(-2.925,2.95) 24(-3.575,2.95)
  silkscreen extent -4.47,-3.07 3.95,1.85, body extent -3.95,-3.28 3.95,3.28, height 1.2
USB4085-GF-A [mm] "USB-C Connector"
  oval 0.8x0.62 hole 0.4: A1(2.18,2.975) A4(2.18,2.125) A5(2.18,1.275) A6(2.18,0.425) A7(2.18,-0.425) A8(2.18,-1.275) A9(2.18,-2.125) A12(2.18,-2.975) B1(0.83,-2.975) B4(0.83,-2.125) B5(0.83,-1.275) B6(0.83,-0.425) B7(0.83,0.425) B8(0.83,1.275) B9(0.83,2.125) B12(0.83,2.975)
  oval 1.8x1 hole 0.6 slot 1.4 at 0 deg: SH(-2.18,-4.325) SH(-2.18,4.325)
  oval 2.5x1 hole 0.6 slot 2.1 at 0 deg: SH(1.2,-4.325) SH(1.2,4.325)
  silkscreen extent -3.92,-4.47 2.88,4.57, body extent -6.41,-4.52 2.76,4.51, height 3.46

## Part data
B1: library part "Breadboard - 300 holes"
C1 C2 C3 C4 C5 C6 C7 C13 C14: library part Cap_CCNP_0603, "Capacitor non-polar SMT 0603"
C8 C9 C10 C11 C12: library part Cap, "Capacitor"
D1 D2 D3 D4 D5 D6 D7 D8 D17 D_CLOCK D_Fail D_REW D_RNS DIE_LED_A DIE_LED_B1 DIE_LED_B2 DIE_LED_C1 DIE_LED_C2 DIE_LED_D1 DIE_LED_D2 LED_0 LED_1 LED_2 LED_3 LED_4 LED_5 LED_6 LED_7 Step_LED1 Step_LED2 Step_LED3 Step_LED4 Step_LED5 Step_LED6 Step_LED7 Step_LED8 Step_LED9 Step_LED10 Step_LED11 Step_LED12: library part LED-0603-Red, "LED 0603 Red"
D_AEW D_ANS: library part LED-0603-Yellow, "LED 0603 Yellow"
D_GEW D_GNS D_Pass D_PEW D_PNS: library part LED-0603-Green, "LED 0603 Green"
F1: "PTC Resetable Fuse 0805 0.5A hold"
M1 M2 M3 M4 M5 M6 M7: library part Mounting_Feet, "Plastic bumper/foot"
N1: library part Nalclip-Edge
OLED: "OLED Display 128x32 pixels, I2C interface"
P8: library part SWD2X5_JIG
P9: library part "Header 1x6"
POWER_BTN S1 S2 S3 S4 S5 S6 S7 S8 S_CEW S_CNW S_FREQ_DOWN S_FREQ_UP S_PEW S_PNS: library part SW_PB-TS, "Tactile Switch SPST 5.10mm X 5.10mm / (1.5mm=C318884) / (2.0mm=C318888) / (3.5mm=C318886)"
R1 R2 R3 R4 R5 R6 R7 R8 R9 R10 R11 R12 R13 R14 R15 R16 R17 R18 R19 R20 R21 R22 R23 R24 R25 R26 R27 R28 R29 R30 R31 R32 R33 R34 R35 R36 R37 R38 R39 R40 R41 R42 R43 R44 R45: library part Res_CR0603, "Resistor SMT 0603"
RN1 RN2 RN3 RN4 RN5 RN6 RN7 RN8 RN9 RN10 RN11 RN12 RN13 RN14 RN15 RN16 RN17 RN19: library part ResistorNetwork_CR0603x4, "SMT x4 Resistor Array"
TP_5V TP_Gnd1 TP_Gnd2 TP_SCL TP_SDA TP_Vdd: library part TP, "Test Point"
U1: "Kinetis K20: 50MHz Cortex-M4 Performance MCU, 160KB Flash, 16KB SRAM, Full-Speed USB, 48-LQFP"
U2: "16-bit I2C I/O Expander (TSSOP24) / PUPs on I/O pins"
U3 U5: "Octal 3-State Buffer/Line Driver/LineReceiver"
U4: "16-bit I2C I/O Expander (TSSOP24) / NO PUPs on I/O pins"
U6: "3.3V LDO with enable"
USB1: "USB-C, USB 2.0 Receptacle Connector 16 Position Through Hole, Right Angle"
Y1: library part "Crystal 16MHz", "Crystal SMD 3.2 x 2.5 x 0.7 mm"
Z1 Z2 Z3 Z4 Z5 Z6 Z7 Z8 Z9 Z10 Z11: "Ultra low capacitance quadruple rail-to-rail ESD protection"

## Via types
v1: diameter 0.5, hole 0.3, Top Layer to Bottom Layer, tented both sides, 854 vias
v2: diameter 0.5, hole 0.3, Top Layer to Bottom Layer, tented bottom, 5 vias

## Nets (pads, with @x,y where several pads share a name; then routed paths per layer and width w, separated by ;. In a path a pad name is that pad's centre, name@x,y a point inside that pad or via, vN(x,y) a via of type N, cw(c..) or ccw(c..) an arc to the next point about the centre after c; other vN are vias at no path point)
5V: C13.2 F1.1 USB1.A4 USB1.A9 USB1.B4 USB1.B9 Z9.5 | length 22.5
  Top Layer w0.254: C13.2@5.767,19.659 C13.2@5.82,19.712
  Top Layer w0.508: USB1.A9@-1.165,17.661 -1.245,17.661 -1.317,17.661 -1.401,17.661 -2.514,17.661 -2.594,17.661 -2.667,17.661 -2.751,17.661 -2.88,17.661 -3.393,18.174 -3.393,21.489 -2.972,21.911 -2.751,21.911 -2.667,21.911 -2.594,21.911 -2.514,21.911 -1.401,21.911 -1.317,21.911 -1.245,21.911 -1.165,21.911 -1.143,21.932 -0.749,21.932 -0.111,22.57 -0.111,23.855 0.252,24.219 4.271,24.219 4.378,24.111 F1.1@4.378,23.723 ; Z9.5@3.63,19.659 3.677,19.705 C13.2@5.72,19.705 ; F1.1@4.378,23.567 4.378,22.081 5.605,20.854 5.605,19.82 C13.2@5.72,19.705 ; C13.2@5.767,19.659 C13.2@5.72,19.705
5V_Fused: C9.2 C10.2 F1.2 TP_5V.1 U1.6 U6.1 | length 107.5
  Top Layer w0.3: 82.525,11.151 82.799,11.425 U1.6@84.023,11.425
  Top Layer w0.381: 8.275,20.355 7.955,20.034 7.955,13.951 8.724,13.182 25.855,13.182 27.03,12.007 27.03,4.79 28.709,3.11 77.038,3.11 78.471,4.543 78.471,5.469 78.217,5.723 78.217,7.927 79.094,8.804 C9.2@80.173,8.804 ; TP_5V.1@8.275,23.723 TP_5V.1@8.526,23.723 ; C9.2@80.249,8.515 80.559,8.824 80.559,9.421 80.662,9.524 81.62,9.524 82.525,10.428 82.525,11.151
  Top Layer w0.508: F1.2@6.578,23.723 8.275,23.723 8.526,23.472 8.526,22.001 8.275,21.75 8.275,20.355 U6.1@9.923,20.355 ; TP_5V.1@8.526,23.723 C10.2@10.904,23.723
C_PLEX0: RN14.4 U1.33 | length 5
  Top Layer w0.254: U1.33@92.173,12.425 93.734,12.425 94.171,11.988 RN14.4@96.952,11.988
C_PLEX1: RN14.3 U1.34 | length 4.8
  Top Layer w0.254: U1.34@92.173,12.925 94.155,12.925 94.292,12.788 RN14.3@96.952,12.788
C_PLEX2: RN14.2 U1.35 | length 4.9
  Top Layer w0.254: U1.35@92.18,13.432 92.173,13.425 93.879,13.425 94.09,13.636 RN14.2@96.952,13.636
C_PLEX3: RN14.1 U1.36 | length 4.9
  Top Layer w0.254: U1.36@92.223,13.925 93.588,13.925 94.051,14.388 RN14.1@96.952,14.388
CAR_EW_BTN: RN17.6 RN19.6 S_CEW.2b | length 86.9
  Top Layer w0.254: RN19.6@98.921,29.365 98.969,29.413 v1(99.873,29.413) ; RN17.6@104.861,29.413 v1(105.765,29.413) 107.036,29.413 115.189,37.566 136.048,37.566 137.628,39.146 137.628,69.389 136.83,70.187 136.83,81.436 S_CEW.2b@136.348,81.436 S_CEW.2b@136.248,81.436
  Bottom Layer w0.254: v1(99.873,29.413) v1(105.765,29.413)
CAR_EW_TDO: R44.1 RN19.3 U1.42 Z11.4 | length 132.5
  Top Layer w0.254: R44.1@-9.435,42.393 -9.461,42.367 -10.465,42.367 -10.668,42.164 -10.668,40.491 -9.522,39.345 -9.105,39.345 -8.47,38.71 -8.47,36.641 -8.166,36.337 Z11.4@-7.512,36.337 -5.471,36.337 -2.997,38.811 20.452,38.811 26.421,32.842 v1(73.482,32.842) ; U1.42@88.373,15.275 88.373,20.162 87.107,21.428 v1(87.107,24.308) 87.107,24.367 88.897,26.157 93.41,26.157 96.62,29.366 RN19.3@97.22,29.366
  Bottom Layer w0.254: v1(73.482,32.842) 75.392,32.842 79.253,28.981 82.453,28.981 87.107,24.328 v1@87.107,24.318
CAR_NS_BTN: RN17.5 RN19.5 S_CNW.2b | length 112.4
  Top Layer w0.254: RN19.5@98.921,28.465 99.132,28.677 v1(99.873,28.677) ; RN17.5@105.025,28.677 v1(105.765,28.677) 106.935,28.677 115.407,37.149 136.17,37.149 138.009,38.988 138.009,69.547 137.272,70.284 137.272,93.257 132.994,97.535 130.16,97.535 127.16,100.535 S_CNW.2b@126.614,100.535
  Bottom Layer w0.254: v1(99.873,28.677) v1(105.765,28.677)
CAR_NS_TCK: R45.1 RN19.4 U1.41 Z11.6 | length 127
  Top Layer w0.254: R45.1@-9.63,40.996 -9.58,40.996 -9.207,40.623 -9.207,40.365 -7.512,38.67 Z11.6@-7.512,38.237 -5.648,38.237 -4.262,39.624 21.158,39.624 26.899,33.884 v1(73.482,33.884) ; U1.41@88.873,15.275 88.873,20.201 87.741,21.333 87.741,24.462 89.055,25.776 93.888,25.776 96.578,28.466 RN19.4@97.22,28.466
  Bottom Layer w0.254: v1(73.482,33.884) 75.933,33.884 80.175,29.642 82.496,29.642 87.732,24.406 v1(87.732,23.952)
CLOCK: C14.2 D_CLOCK.A R36.2 U1.46 Z10.3 Z10.4 | length 129.2
  Top Layer w0.254: C14.2@30.683,86.272 R36.2@31.953,86.272 D_CLOCK.A@34.29,86.272 34.29,84.787 34.937,84.14 Z10.3@39.186,84.14 Z10.4@41.586,84.14 ; Z10.3@39.338,83.837 39.338,55.566 44.918,49.986 82.336,49.986 87.406,44.916 89.094,44.916 90.193,43.817 90.193,36.639 v1(89.876,36.321) ; U1.46@86.373,15.275 86.373,17.332 85.647,18.058 85.647,20.296 84.567,21.376 84.567,25.012 87.541,27.986 89.026,27.986 v1(89.055,27.957)
  Bottom Layer w0.254: v1(89.055,27.957) 89.055,35.5 v1(89.876,36.321)
CP_0: RN14.5 Step_LED1.K Step_LED2.A Step_LED7.K Step_LED8.A Step_LED11.K Step_LED12.A | length 79.2
  Top Layer w0.254: RN14.5@98.704,11.988 99.135,11.988 99.589,12.442 114.761,12.442 115.722,11.481 124.577,11.481 124.576,11.5 ; Step_LED2.A@119.633,31.922 118.78,33.661 cw(c123.713,23.065) 122.874,34.723 ; 122.828,34.731 cw(c123.682,23.074) 122.873,34.734 ; Step_LED1.K@122.975,32.796 122.873,34.734 ; Step_LED7.K@124.471,13.481 124.576,11.5 ; 124.484,11.493 ccw(c123.631,23.15) 124.576,11.5 ; Step_LED8.A@127.813,14.355 128.636,12.588 ; 128.657,12.543 128.636,12.588 ; Step_LED12.A@129.285,31.072 130.389,32.646 ; Step_LED11.K@131.713,28.615 133.332,29.668 ; 133.299,29.718 cw(c123.631,23.15) 133.333,29.668 ; 133.35,29.642 ccw(c123.682,23.074) 133.332,29.668 ; 122.873,34.734 cw(c123.682,23.074) 130.389,32.646 ; 124.576,11.5 ccw(c123.631,23.15) 128.636,12.588 ; 128.636,12.588 ccw(c123.631,23.15) 133.333,29.668 ; 130.389,32.646 cw(c123.682,23.074) 133.332,29.668
CP_1: RN14.6 Step_LED1.A Step_LED2.K Step_LED3.K Step_LED4.A Step_LED9.K Step_LED10.A | length 75.5
  Top Layer w0.254: RN14.6@98.704,12.831 98.712,12.823 115.13,12.823 115.528,12.425 v1(115.595,12.425) ; 112.083,24.177 ccw(c124.278,23.37) v1@115.492,14.874 ; 112.085,24.214 Step_LED4.A@114.071,24.039 ; 112.086,24.234 cw(c123.723,23.138) 113.201,28.228 ; Step_LED3.K@114.986,27.319 113.201,28.228 ; v1@115.473,14.855 115.493,14.834 115.518,14.808 115.519,14.809 v1(115.519,14.859) ; Step_LED2.K@118.161,31.072 119.641,28.962 cw(c123.723,23.138) 124.347,30.223 ; Step_LED2.K@118.196,31.128 117.12,32.783 ccw(c123.723,23.138) 113.201,28.228 ; Step_LED1.A@124.573,32.79 124.347,30.223 ; 131.351,22.467 130.808,22.514 ; Step_LED9.K@132.507,19.049 130.171,20.136 ccw(c123.723,23.138) 130.808,22.514 ; Step_LED10.A@133.375,22.288 130.808,22.514 ; 124.347,30.223 cw(c123.723,23.138) 130.808,22.514
  Bottom Layer w0.254: v1(115.519,14.859) v1(115.595,12.425)
CP_2: RN14.7 Step_LED3.A Step_LED4.K Step_LED5.K Step_LED6.A Step_LED7.A Step_LED8.K | length 62.5
  Top Layer w0.254: RN14.7@98.704,13.588 99.139,13.588 99.515,13.212 115.679,13.212 116.191,12.7 122.087,12.7 Step_LED7.A@122.873,13.486 122.988,14.789 ; Step_LED3.A@115.789,28.701 117.9,27.221 ccw(c123.723,23.138) 116.639,22.514 Step_LED4.K@114.071,22.288 112.581,22.266 ccw(c123.723,23.138) 114.597,16.687 115.595,17.431 115.789,17.576 116.86,18.327 ccw(c123.723,23.138) 118.912,16.275 ; Step_LED6.A@118.161,15.205 118.912,16.275 ; Step_LED8.K@129.336,15.154 129.296,15.212 128.606,16.326 cw(c123.723,23.138) 122.988,14.789 ; 118.912,16.275 ccw(c123.723,23.138) 122.988,14.789
CP_3: RN14.8 Step_LED5.A Step_LED6.K Step_LED9.A Step_LED10.K Step_LED11.A Step_LED12.K | length 70.6
  Top Layer w0.254: RN14.8@98.704,14.388 99.15,14.388 99.945,13.593 115.947,13.593 116.459,13.081 118.36,13.081 Step_LED6.K@119.633,14.355 v1(120.675,13.867) ; Step_LED5.A@114.939,19.049 117.276,20.136 ccw(c123.723,23.138) 129.547,19.056 Step_LED9.A@131.657,17.576 132.909,16.773 ccw(c123.723,23.138) 133.824,27.92 132.503,27.236 132.324,27.143 131.322,26.676 ccw(c123.723,23.138) 127.189,30.77 Step_LED12.K@127.813,31.922 ; Step_LED5.A@114.955,19.017 Step_LED5.A@115.016,19.049 ; Step_LED10.K@133.375,23.988 134.806,24.178
  Bottom Layer w0.254: v1(120.675,13.867) v1(121.501,16.379)
DIE_I_A: P5.7 P5.8 RN9.8 | length 6.8
  Top Layer w0.254: RN9.8@93.64,54.571 94.602,54.571 P5.8@96.926,56.895 P5.7@99.466,56.895
DIE_I_B: P5.5 P5.6 RN9.7 | length 6.1
  Top Layer w0.254: RN9.7@93.64,53.771 95.235,53.771 95.819,54.355 P5.6@96.926,54.355 P5.5@99.466,54.355
DIE_I_C: P5.3 P5.4 RN9.6 | length 6.3
  Top Layer w0.254: RN9.6@93.64,52.971 95.77,52.971 P5.4@96.926,51.815 P5.3@99.466,51.815
DIE_I_D: P5.1 P5.2 RN9.5 | length 7
  Top Layer w0.254: RN9.5@93.767,52.171 RN9.5@93.94,51.998 ; RN9.5@93.813,51.998 94.203,51.998 P5.2@96.926,49.275 P5.1@99.466,49.275
DIE_IR_A: RN7.8 RN9.1 U5.2 U5.9 Z7.6 | length 20.2
  Top Layer w0.254: RN7.8@85.151,64.479 U5.2@87.256,64.479 88.185,64.479 89.149,63.515 89.149,60.918 88.16,59.929 U5.9@87.256,59.929 87.158,59.831 86.399,59.831 86.167,59.599 86.167,57.109 87.101,56.175 88.626,56.175 89.848,54.954 Z7.6@90.073,54.954 91.109,54.954 91.492,54.571 RN9.1@92.34,54.571
DIE_IR_B: RN7.7 RN9.2 U5.3 U5.8 Z7.4 | length 22.2
  Top Layer w0.254: RN7.7@85.151,63.702 85.547,63.702 85.673,63.829 U5.3@87.256,63.829 88.175,63.829 88.737,63.266 88.737,61.192 88.124,60.579 U5.8@87.256,60.579 86.317,60.579 85.736,59.997 85.736,56.844 86.92,55.66 88.393,55.66 89.094,54.959 89.094,53.203 89.243,53.054 Z7.4@90.073,53.054 90.156,52.971 90.239,53.054 91.089,53.054 91.806,53.771 RN9.2@92.34,53.771
DIE_IR_C: RN7.6 RN9.3 U5.4 U5.7 Z7.1 | length 22.1
  Top Layer w0.254: RN7.6@85.151,62.902 RN7.6@85.417,62.902 ; RN7.6@85.417,62.972 85.486,63.04 86.139,63.04 86.278,63.179 U5.4@87.256,63.179 88.113,63.179 88.301,62.991 88.301,61.391 88.139,61.229 87.356,61.229 U5.7@87.33,61.203 ; U5.7@87.256,61.229 86.09,61.229 85.304,60.442 85.304,56.497 86.847,54.954 Z7.1@87.673,54.954 88.343,54.954 88.592,54.705 88.592,52.971 89.113,52.45 91.298,52.45 91.755,52.906 92.275,52.906 RN9.3@92.34,52.971
DIE_IR_D: RN7.5 RN9.4 U5.5 U5.6 Z7.3 | length 19.3
  Top Layer w0.254: RN7.5@85.151,62.102 85.151,61.248 84.847,60.943 84.847,56.202 86.146,54.903 86.146,53.529 86.621,53.054 Z7.3@87.673,53.054 87.898,53.054 88.959,51.993 RN9.4@92.162,51.993 ; RN7.5@85.417,62.072 85.426,62.081 86.205,62.081 ; U5.6@87.256,61.879 86.407,61.879 86.205,62.081 ; U5.5@87.256,62.529 86.653,62.529 86.205,62.081 ; RN9.4@92.289,51.993 RN9.4@92.467,52.171
DIE_LED_A: DIE_LED_A.A RN8.8 | length 32.3
  Top Layer w0.254: RN8.8@117.918,56.463 118.702,56.463 119.151,56.912 119.151,59.674 119.928,60.451 134.01,60.451 134.391,60.07 134.391,56.26 133.756,55.625 131.851,55.625 131.089,54.863 131.089,53.374 129.95,52.235 DIE_LED_A.A@128.295,52.235
DIE_LED_B1: DIE_LED_B1.A RN8.7 | length 6
  Top Layer w0.254: RN8.7@117.918,55.663 118.808,55.663 119.532,56.387 122.287,56.387 DIE_LED_B1.A@123.215,57.315
DIE_LED_B2: DIE_LED_B2.A RN10.6 | length 20.4
  Top Layer w0.254: RN10.6@117.918,50.545 118.679,50.545 119.151,50.073 119.151,46.735 120.624,45.262 130.339,45.262 132.232,47.155 DIE_LED_B2.A@133.375,47.155
DIE_LED_C1: DIE_LED_C1.A RN8.6 | length 16.5
  Top Layer w0.254: RN8.6@117.918,54.863 118.77,54.863 119.644,55.737 129.257,55.737 130.835,57.315 DIE_LED_C1.A@133.375,57.315
DIE_LED_C2: DIE_LED_C2.A RN10.7 | length 11.2
  Top Layer w0.254: RN10.7@117.918,51.345 118.707,51.345 119.634,50.418 123.977,50.418 124.651,49.744 124.651,47.536 124.27,47.155 DIE_LED_C2.A@123.215,47.155
DIE_LED_D1: DIE_LED_D1.A RN8.5 | length 8.1
  Top Layer w0.254: RN8.5@117.918,54.063 118.732,54.063 119.786,55.117 121.578,55.117 122.199,54.496 122.199,52.542 122.506,52.235 DIE_LED_D1.A@123.215,52.235
DIE_LED_D2: DIE_LED_D2.A RN10.8 | length 16.5
  Top Layer w0.254: RN10.8@117.918,52.145 118.694,52.145 119.939,50.901 130.353,50.901 131.687,52.235 DIE_LED_D2.A@133.375,52.235
DIE_R_A: RN8.1 U5.18 | length 28.4
  Top Layer w0.254: U5.18@93.156,63.854 111.619,63.854 112.827,63.854 116.103,60.578 RN8.1@116.103,56.463
DIE_R_B1: RN8.2 U5.17 | length 28.7
  Top Layer w0.254: U5.17@93.156,63.204 111.912,63.204 112.736,63.204 115.407,60.533 115.407,56.863 115.407,55.978 115.722,55.663 RN8.2@116.103,55.663
DIE_R_B2: RN10.3 U5.12 | length 32.9
  Top Layer w0.254: U5.12@93.156,59.954 102.279,59.954 104.927,57.305 104.927,49.656 105.943,48.64 112.877,48.64 114.782,50.545 RN10.3@116.103,50.545
DIE_R_C1: RN8.3 U5.16 | length 29.2
  Top Layer w0.254: U5.16@93.156,62.554 111.912,62.554 112.73,62.554 114.909,60.375 114.909,55.168 115.214,54.863 RN8.3@116.103,54.863
DIE_R_C2: RN10.2 U5.13 | length 28.7
  Top Layer w0.254: U5.13@93.156,60.604 102.6,60.604 105.435,57.769 105.435,54.482 106.832,53.085 112.966,53.085 114.706,51.345 RN10.2@116.103,51.345
DIE_R_D1: RN8.4 U5.15 | length 29.2
  Top Layer w0.254: U5.15@93.156,61.904 111.492,61.904 112.517,61.904 114.472,59.949 114.472,54.873 115.282,54.063 RN8.4@116.103,54.063
DIE_R_D2: RN10.1 U5.14 | length 28.6
  Top Layer w0.254: U5.14@93.156,61.254 102.854,61.254 106.578,57.53 113.055,57.53 113.787,56.798 113.787,53.572 115.214,52.145 RN10.1@116.103,52.145
DM0: U1.8
EW_AMBER_LED: D_AEW.A U4.14 | length 52.3
  Top Layer w0.254: U4.14@93.285,96.275 94.371,96.275 94.793,96.697 104.879,96.697 106.753,94.823 106.753,80.499 107.269,79.984 127.127,79.984 127.609,80.466 128.778,80.466 129.438,79.806 D_AEW.A@129.438,79.589
EW_CAR_B: P1.5 P1.6 RN11.7 | length 5.7
  Top Layer w0.254: RN11.7@94.092,81.431 96.063,81.431 P1.6@96.926,82.295 P1.5@99.466,82.295
EW_CAR_O: RN11.2 U4.9 Z5.1 | length 24
  Top Layer w0.254: Z5.1@82.58,96.986 82.825,96.986 83.413,97.575 U4.9@87.053,97.575 88.09,97.575 88.912,96.752 88.912,93.692 88.496,93.276 88.496,86.353 90.993,83.855 90.993,82.193 91.755,81.431 RN11.2@91.978,81.431
EW_GREEN_LED_BTN: D_GEW.A U4.15 | length 57.6
  Top Layer w0.254: U4.15@93.285,96.925 94.283,96.925 94.527,97.169 105.053,97.169 106.589,95.633 108.74,95.633 109.281,95.092 109.281,92.582 108.723,92.023 107.99,92.023 107.134,91.168 107.134,80.657 107.426,80.365 126.924,80.365 127.508,80.949 128.956,80.949 129.413,80.492 130.454,80.492 130.708,80.238 D_GEW.A@130.708,79.589
EW_LIGHTS0_B: P1.11 P1.12 RN12.6 | length 5.9
  Top Layer w0.254: RN12.6@93.94,90.779 96.063,90.779 P1.12@96.926,89.915 P1.11@99.466,89.915
EW_LIGHTS0_I: RN12.3 RN16.3 U4.6 Z6.3 | length 25.8
  Top Layer w0.254: Z6.3@82.605,100.116 82.83,100.116 83.421,99.525 U4.6@86.603,99.525 ; U4.6@86.595,99.427 86.955,99.427 U4.6@87.053,99.525 U4.6@86.603,99.525 ; v1(91.476,90.829) 92.233,90.829 RN12.3@92.284,90.779 ; RN16.3@92.34,85.584 91.362,85.584 89.8,87.146 v1(89.8,90.829) 89.8,92.963 90.055,93.219 90.055,97.798 88.328,99.525 U4.6@86.603,99.525
  Bottom Layer w0.254: v1(89.8,90.829) v1(91.476,90.829)
EW_LIGHTS1_B: P1.9 P1.10 RN12.5 | length 6.8
  Top Layer w0.254: RN12.5@93.94,89.979 94.65,89.979 95.734,88.895 95.734,88.568 P1.10@96.926,87.375 P1.9@99.466,87.375
EW_LIGHTS1_I: RN12.4 RN16.4 U4.7 Z6.1 | length 33.2
  Top Layer w0.254: Z6.1@82.605,102.016 81.807,102.016 81.646,101.855 81.646,99.495 82.316,98.825 87.003,98.825 U4.7@87.053,98.875 88.269,98.875 89.674,97.47 89.674,93.377 89.258,92.961 89.258,86.971 91.445,84.784 92.953,84.784 93.156,84.988 93.156,88.104 92.34,88.921 RN12.4@92.34,90.029
EW_PED_B: P1.1 P1.2 RN11.5 | length 6.9
  Top Layer w0.254: RN11.5@94.092,79.831 95.098,79.831 95.734,79.196 95.734,78.407 P1.2@96.926,77.215 P1.1@99.466,77.215
EW_PED_LED_BN: D_PEW.A U4.16 | length 54.8
  Top Layer w0.254: U4.16@93.285,97.575 93.372,97.662 105.446,97.662 v1(106.589,96.519) ; v1(105.074,94.969) 105.991,94.052 105.991,80.183 106.978,79.196 125.374,79.196 126.517,78.053 D_PEW.A@126.517,75.779
  Bottom Layer w0.254: v1(105.074,94.969) 105.074,94.987 106.589,96.502 v1(106.589,96.519)
EW_PED_O: RN11.4 U4.11 Z5.4 | length 23
  Top Layer w0.254: Z5.4@84.98,95.086 84.99,95.097 85.729,95.097 85.878,95.245 85.878,95.943 86.21,96.275 U4.11@87.053,96.275 87.885,96.275 88.149,96.011 88.149,94.006 87.734,93.592 87.734,86.037 90.206,83.565 90.206,80.988 91.363,79.831 RN11.4@92.34,79.831
EW_RED_LED: D_REW.A U4.13 | length 50.5
  Top Layer w0.254: U4.13@93.285,95.625 94.371,95.625 94.91,96.163 104.766,96.163 106.372,94.557 106.372,80.341 107.136,79.577 127.127,79.577 127.33,79.374 127.953,79.374 D_REW.A@128.168,79.589
EXTAL: U1.24 Y1.3 | length 6.9
  Top Layer w0.254: U1.24@90.873,7.125 92.586,7.125 93.168,6.543 93.168,5.299 93.388,5.079 94.654,5.079 95.654,4.079 Y1.3@95.654,3.979
Fail: D_Fail.A U1.48 | length 137.2
  Top Layer w0.254: D_Fail.A@-10.072,68.097 -6.883,68.097 -2.057,63.271 v1(-2.057,40.894) ; v1@-2.108,35.56 v1(-2.057,35.56) 18.517,35.56 24.816,29.261 v1(72.568,29.261) ; v1@85.352,16.727 85.373,16.706 U1.48@85.373,15.275
  Bottom Layer w0.254: v1(-2.057,35.56) v1(-2.057,40.894) ; v1(72.568,29.261) 74.198,29.261 78.174,25.285 81.679,25.285 85.344,21.62 v1(85.344,16.866)
FREQ_DOWN: R34.1 S_FREQ_DOWN.2 S_FREQ_DOWN.2b U1.31 | length 174.2
  Top Layer w0.254: S_FREQ_DOWN.2b@-2.125,94.402 S_FREQ_DOWN.2@-2.125,88.202 -2.125,87.19 -1.117,86.181 4.724,86.181 42.9,48.005 v1(81.476,48.005) ; S_FREQ_DOWN.2b@-2.125,94.75 -0.842,94.75 R34.1@-0.469,95.123 ; v1(88.849,49.53) 91.926,49.53 96.45,45.006 96.45,42.978 102.256,37.171 102.256,16.946 102.845,16.358 v1(102.845,15.519) ; U1.31@92.223,11.425 93.338,11.425 94.323,10.439 v1(102.845,10.439)
  Bottom Layer w0.254: v1(81.476,48.005) 81.477,48.006 84.785,48.006 v1(88.849,49.53) ; v1(102.845,10.439) v1(102.845,15.519)
FREQ_UP: R33.1 S_FREQ_UP.2 U1.32 | length 176.3
  Top Layer w0.254: S_FREQ_UP.2@-2.125,96.729 -0.805,96.729 R33.1@-0.469,96.393 ; S_FREQ_UP.2@-2.125,97.202 -2.125,96.983 -2.921,96.187 -2.921,87.274 -1.447,85.8 4.566,85.8 42.869,47.497 v1(82.117,47.497) ; v1(89.332,49.022) 91.836,49.022 96.069,44.789 96.069,42.624 101.875,36.818 101.875,16.454 102.159,16.171 v1(102.159,15.519) ; U1.32@92.223,11.925 93.553,11.925 94.632,10.846 101.448,10.846 101.702,11.1 v1(102.159,11.1) ; v1@102.26,15.476 v1@102.26,15.519
  Bottom Layer w0.254: v1(82.117,47.497) 82.118,47.498 85.268,47.498 v1(89.332,49.022) ; v1(102.159,11.1) v1(102.159,15.519)